# Altium PCB powersupply5v.PcbDoc
Units mil, origin at the board's own origin, x right, y up, seen from the top; angles counter-clockwise.
Board outline 3327.01 x 3327.01 mil, 2 copper layers (Top Layer, Bottom Layer); 8 components, 0 nets, 22 pads, 0 vias.
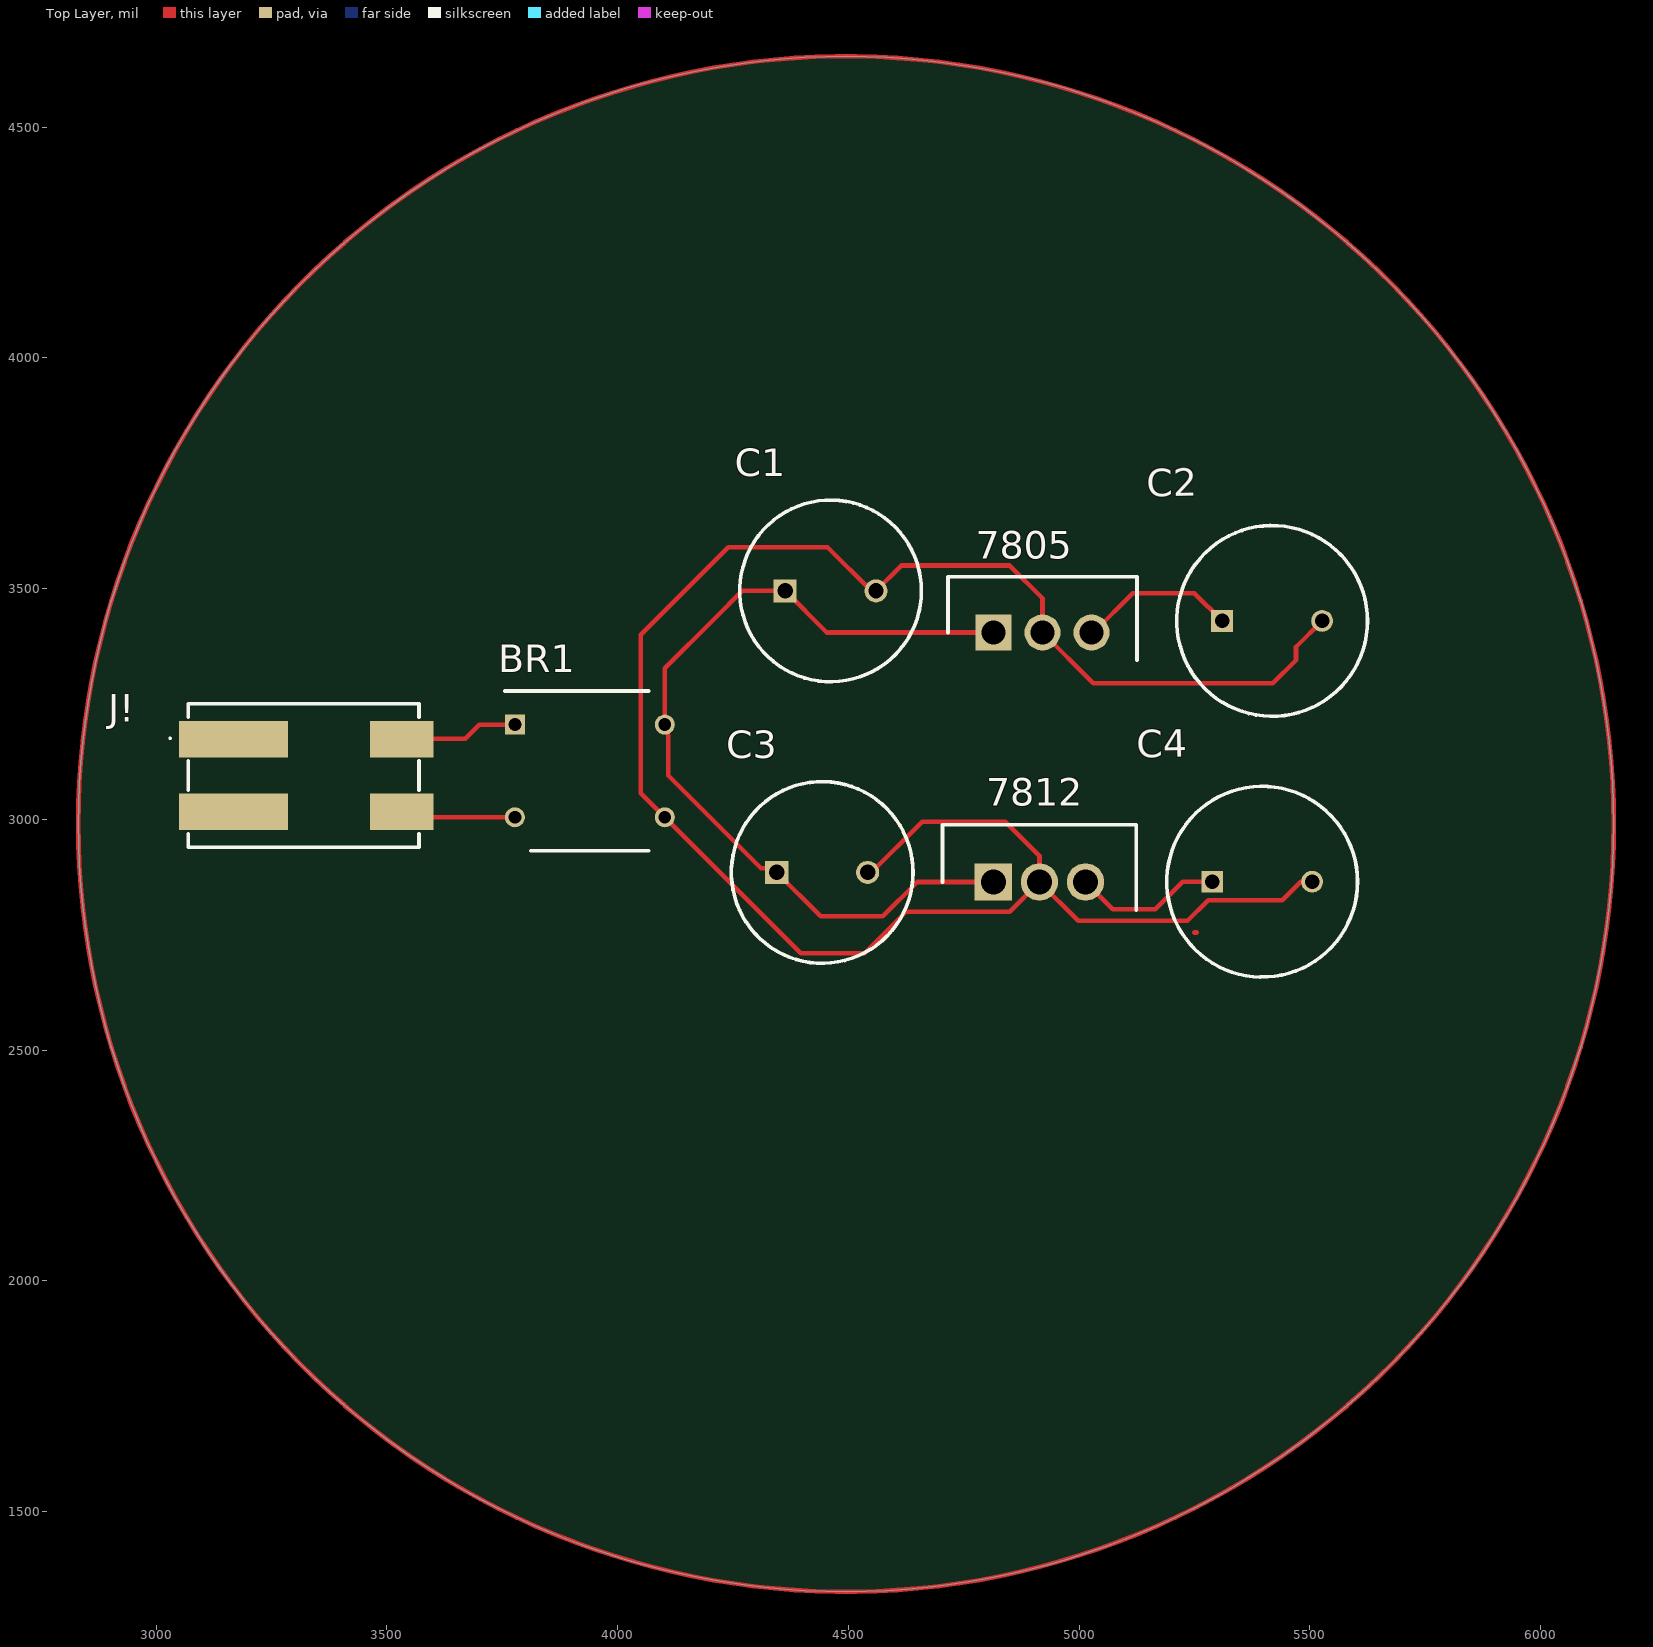
[diagram p0: Top Layer view]
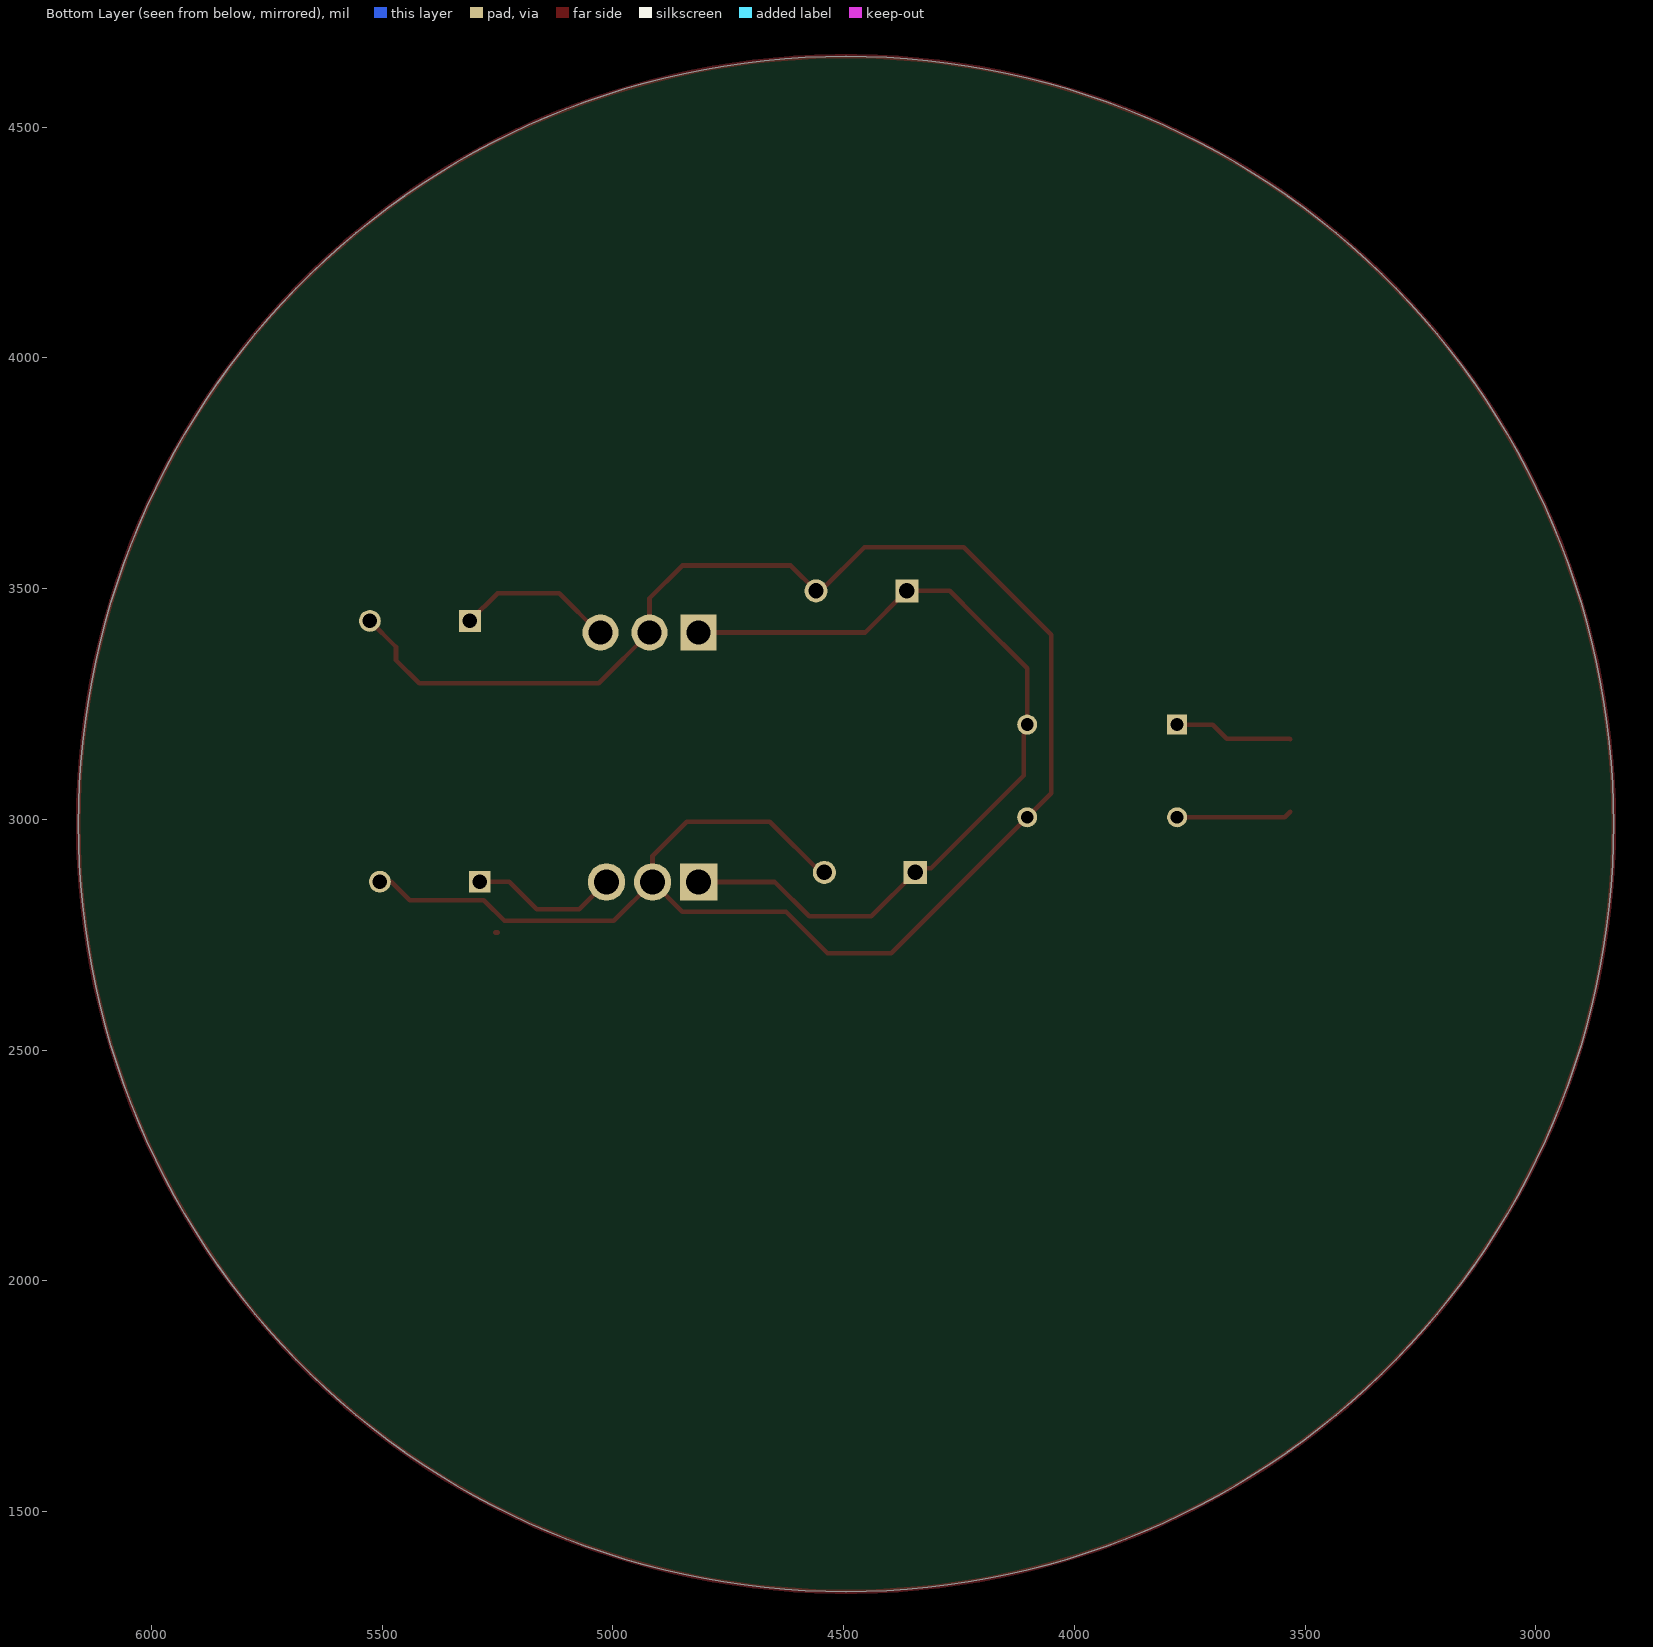
[diagram p1: Bottom Layer view, seen from below]

## Layer stack, top to bottom
Top Solder: solder mask 0.4, Solder Resist, Dk 3.5
Top Layer: signal copper 1.4
Dielectric 1: dielectric 12.6, FR-4, Dk 4.8
Bottom Layer: signal copper 1.4
Bottom Solder: solder mask 0.4, Solder Resist, Dk 3.5

## Board outline
2831.49,2990 ccw(c4495,2990) 4495,1326.49 ccw(c4495,2990) 6158.51,2990 ccw(c4495,2990) 4495,4653.51 ccw(c4495,2990)

## Design rules (kind name [scope] priority, off if disabled: settings)
Clearance [All] p1: gap=10 ignorepadtopadclearanceinfootprint=FALSE except(0: Arc-Hole Track-Hole SMDPad-Hole THPad-Hole Via-Hole Fill-Hole Poly-Hole Region-Hole Text-Hole)
PolygonConnect [All] p1: connectstyle=Relief reliefconductorwidth=10 reliefentries=4 polygonreliefangle="90 Angle" airgapwidth=10
RoutingVias [All] p1: holewidth=28 width=50 viastyle="Through Hole" minholewidth=28 minwidth=50 maxholewidth=28 maxwidth=50
SolderMaskExpansion [All] p1: expansion=4 istentingtop=FALSE
Width [All] p1: maxlimit=10 minlimit=10 preferedwidth=10
30 further rules are at their usual default settings.

## Components (designator, comment, footprint, x,y, rotation, side; value= is the part's Value field where it differs from the comment)
7805 "Comment" TO270P460X1020X2008-3P 4814.52,3405 r0 top
7812 "Comment" TO254P470X1016X2019-3P 4814.35,2864.35 r0 top
BR1 "Comment" DIP825W50P510L830H340Q4N 3940,3105 r0 top
C1 "Comment" CAPPRD500W65D1000H3200 4363.15,3495 r0 top
C2 "Comment" CAPPRD550W60D1050H2150 5310,3430 r0 top net-tie
C3 "Comment" CAPPRD500W65D1000H3200 4345,2885 r0 top
C4 "Comment" CAPPRD550W60D1050H2150 5288.46,2865 r0 top net-tie
J! "Comment" 2060452998404 3315,3095 r0 top

## Footprints (in the part's own frame and the unit in brackets; to place one, negate y for a bottom-side part, rotate by r counter-clockwise, add the part's x,y. Pads: shape width x height; smd on the part's side, far side on the other; paste and mask are expansions set on the pad)
2060452998404 [mm]
  rect 6x2 smd: 1(-3.725,2) 3(-3.725,-2)
  rect 3.5x2 smd: 2(5.525,2) 4(5.525,-2)
  silkscreen extent -7.27,-3.95 6.48,3.95, body extent -6.55,-3.95 6.55,3.95, height 4.5
CAPPRD500W65D1000H3200 [mm]
  rect 1.275x1.275 hole 0.85: 1(0,0)
  round 1.275 hole 0.85: 2(5,0)
  silkscreen extent -2.5,-5 7.5,5, body extent -2.73,-5.25 7.75,5.25, height 32
CAPPRD550W60D1050H2150 [mm]
  rect 1.2x1.2 hole 0.8: 1(0,0)
  round 1.2 hole 0.8: 2(5.5,0)
  silkscreen extent -2.5,-5.25 8,5.25, body extent -2.5,-5.24 8,5.24, height 21.5
DIP825W50P510L830H340Q4N [mm]
  rect 1.1x1.1 hole 0.7: 1(-4.125,2.55)
  round 1.1 hole 0.7: 2(-4.125,-2.55) 3(4.125,-2.55) 4(4.125,2.55)
  silkscreen extent -4.67,-4.4 3.25,4.4, body extent -4.25,-4.15 4.25,4.15, height 3.4
TO254P470X1016X2019-3P [mm]
  rect 2.055x2.055 hole 1.37: 1(0,0)
  round 2.055 hole 1.37: 2(2.535,0) 3(5.07,0)
  silkscreen extent -2.8,-1.55 7.87,3.15, body extent -2.55,-1.55 7.61,3.15, height 18.54
TO270P460X1020X2008-3P [mm]
  rect 1.98x1.98 hole 1.32: 1(0,0)
  round 1.98 hole 1.32: 2(2.7,0) 3(5.4,0)
  silkscreen extent -2.5,-1.53 7.9,3.07, body extent -2.4,-1.53 7.8,3.07, height 19.22

## Nets (pads, with @x,y where several pads share a name; then routed paths per layer and width w, separated by ;. In a path a pad name is that pad's centre, name@x,y a point inside that pad or via, vN(x,y) a via of type N, cw(c..) or ccw(c..) an arc to the next point about the centre after c; other vN are vias at no path point)
pads on no net: 7805.1 7805.2 7805.3 7812.1 7812.2 7812.3 BR1.1 BR1.2 BR1.3 BR1.4 C1.1 C1.2 C2.1 C2.2 C3.1 C3.2 C4.1 C4.2 J!.1 J!.2 J!.3 J!.4
copper on no net: | length 17996
  Top Layer w10: 3532.52,3016.26 3544.17,3004.61 3777.6,3004.61 3782.99,3010 ; 3532.52,3173.74 3533.78,3175 3670,3175 3700.39,3205.39 3777.6,3205.39 ; 4104.7,3002.3 4050,3057.01 4050,3400 4240,3590 4455,3590 4550,3495 4560,3495 4615,3550 4850,3550 4920.82,3479.18 4920.82,3405 5030,3295.82 5030.82,3295 5420,3295 5470,3345 5470,3373.46 5526.54,3430 ; 4107.01,3000 4102.4,3004.61 4397.01,2710 4535,2710 4625,2800 4670,2800 4849.8,2800 4914.15,2864.35 ; 4550,2885 4660,2995 4840,2995 4914.15,2920.85 4914.15,2864.35 ; 4814.35,2864.35 4649.35,2864.35 4575,2790 4440,2790 4345,2885 4335.76,2894.24 4310.76,2894.24 4110,3095 4110,3182.88 4108.77,3184.11 4108.77,3199.02 4102.4,3205.39 4102.4,3327.4 4210,3435 4270,3495 4363.15,3495 4453.15,3405 4640,3405 4814.52,3405 4818.7,3405 ; 4814.52,3400.82 4818.7,3405 ; 4815.98,3407.72 4818.7,3405 ; 5013.96,2864.35 5073.31,2805 5165,2805 5225,2865 5288.46,2865 ; 5031.3,3405 5116.3,3490 5250,3490 5310,3430 ; 5250,2755 5255,2755 ; 5505,2865 5480,2865 5440,2825 5280,2825 5235,2780 4998.5,2780 4914.15,2864.35 ; 3784.61,3205.39 3785,3205 3784.61,3205.39 ; 6158.51,2990 ccw(c4495,2990) 6158.51,2990
  Bottom Layer w10: 3769.61,3205.39 3777.6,3205.39